# Altium PCB Core CNC Shield.PcbDoc (part 1 of 2)
Units mm, origin at the board's own origin, x right, y up, seen from the top; angles counter-clockwise.
Board outline 51.13 x 88 mm, 4 copper layers (Top signal, Ground, Power, Bottom signal); 105 components, 109 nets, 541 pads, 191 vias.
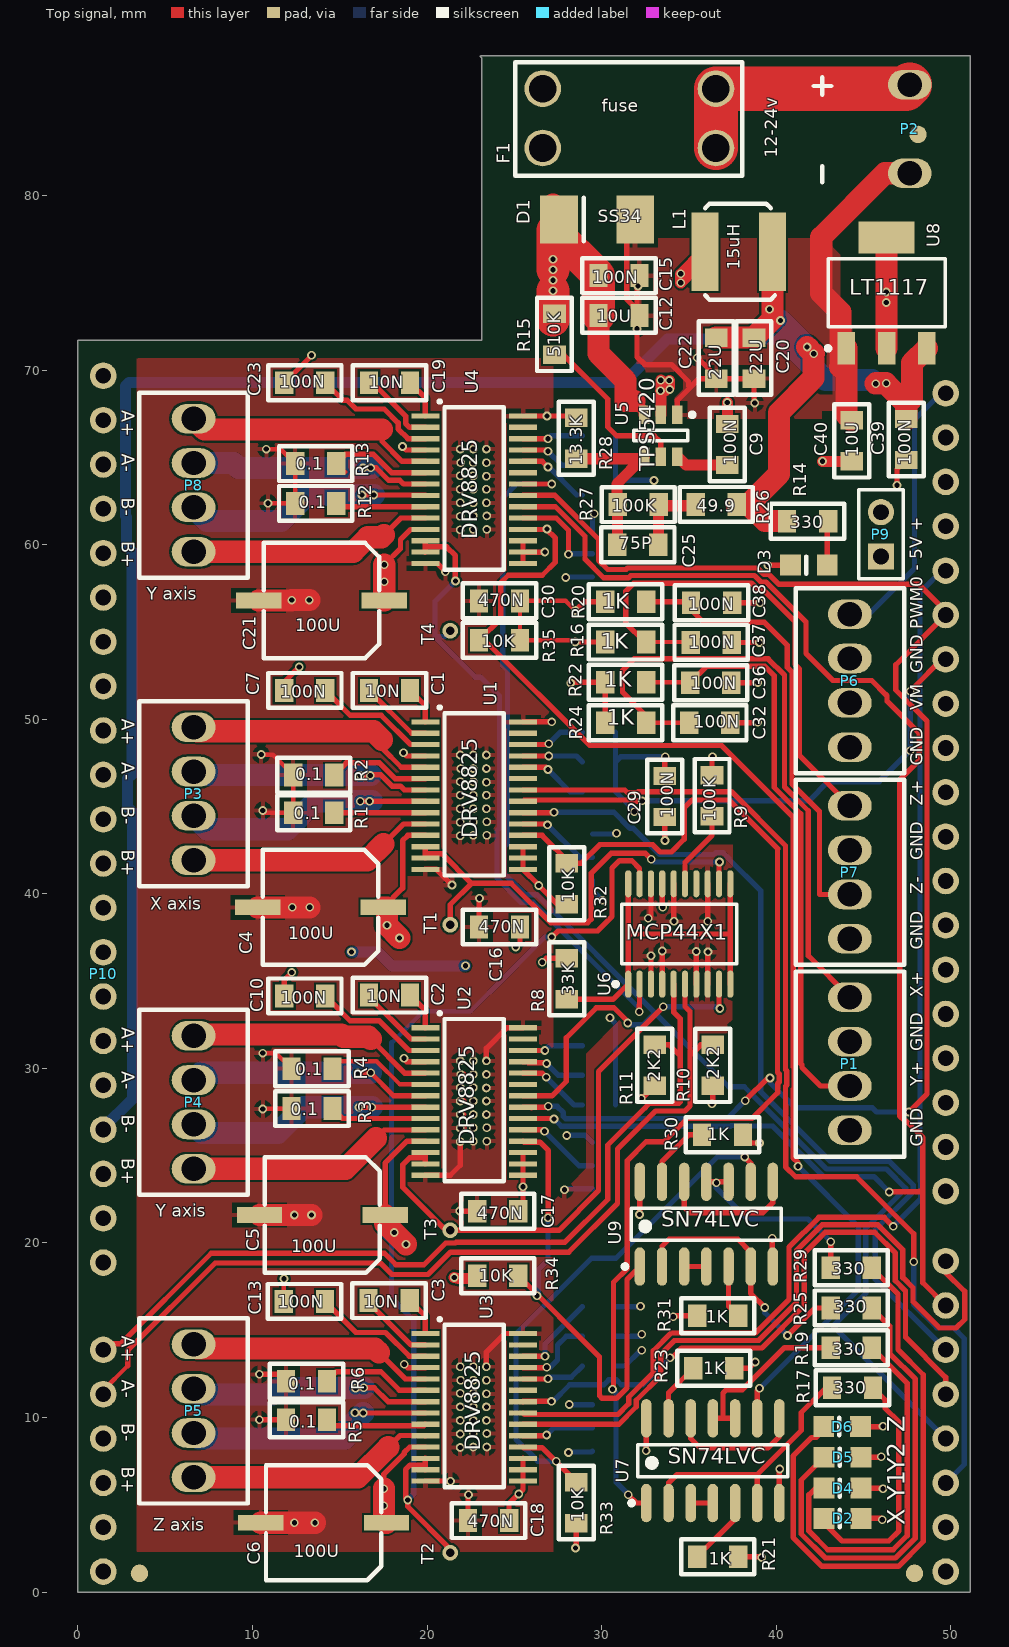
[diagram p0: Top signal view]
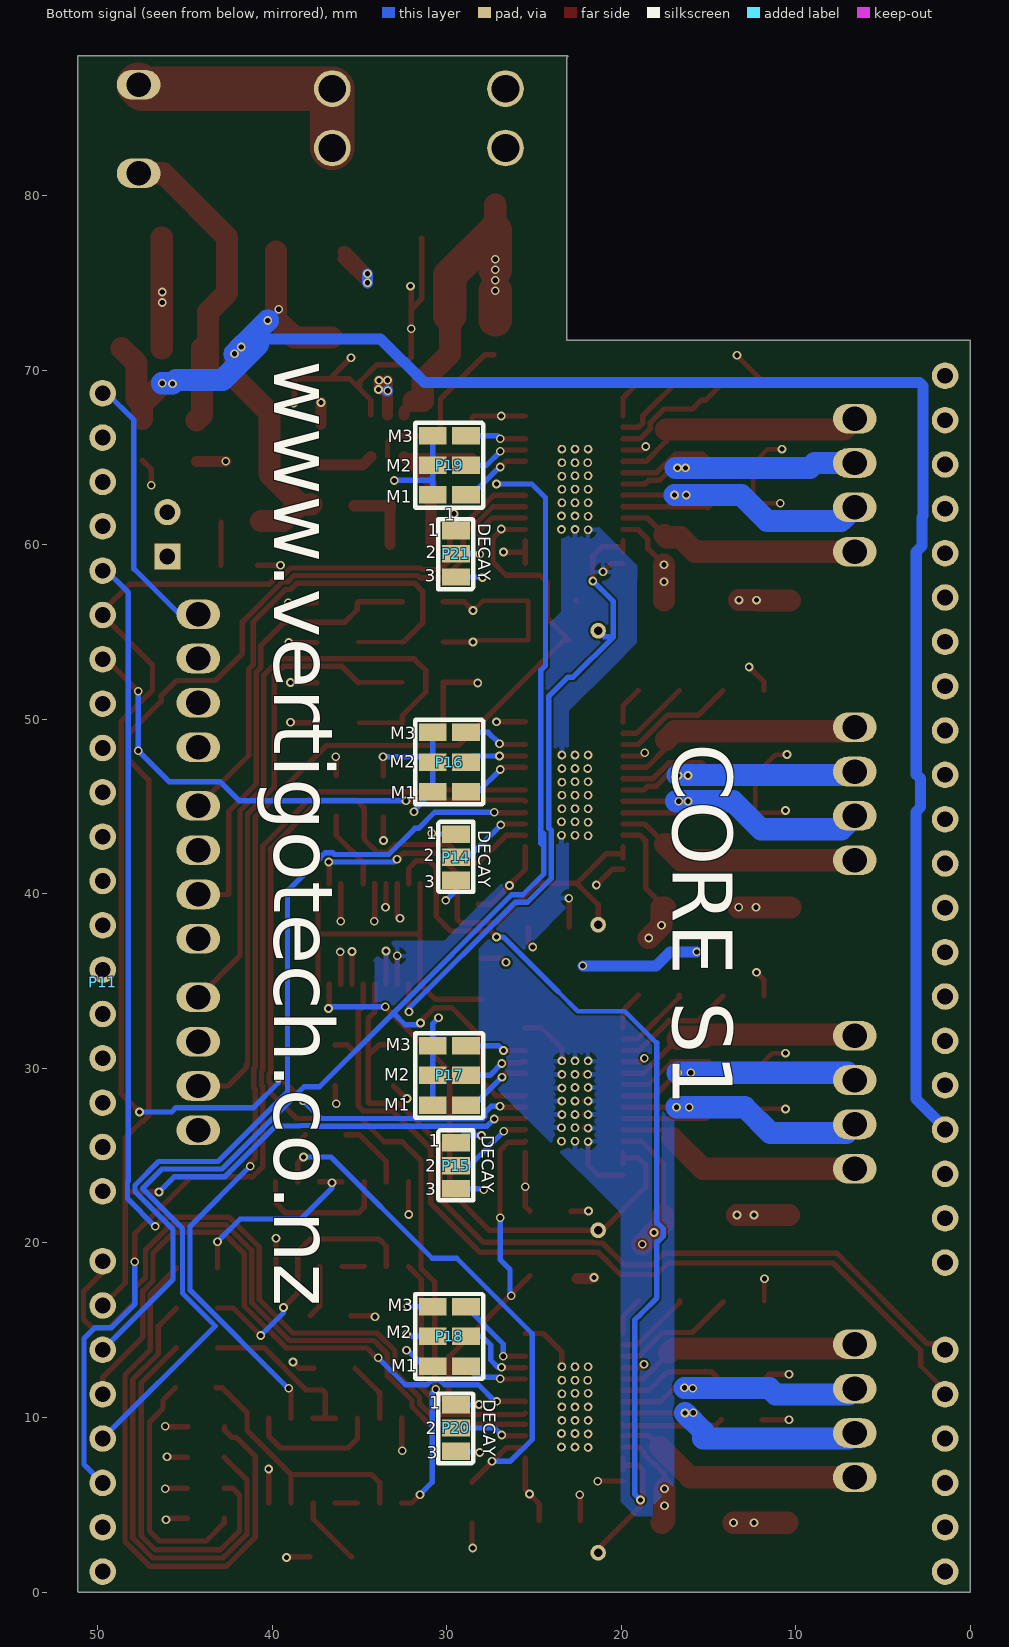
[diagram p1: Bottom signal view, seen from below]
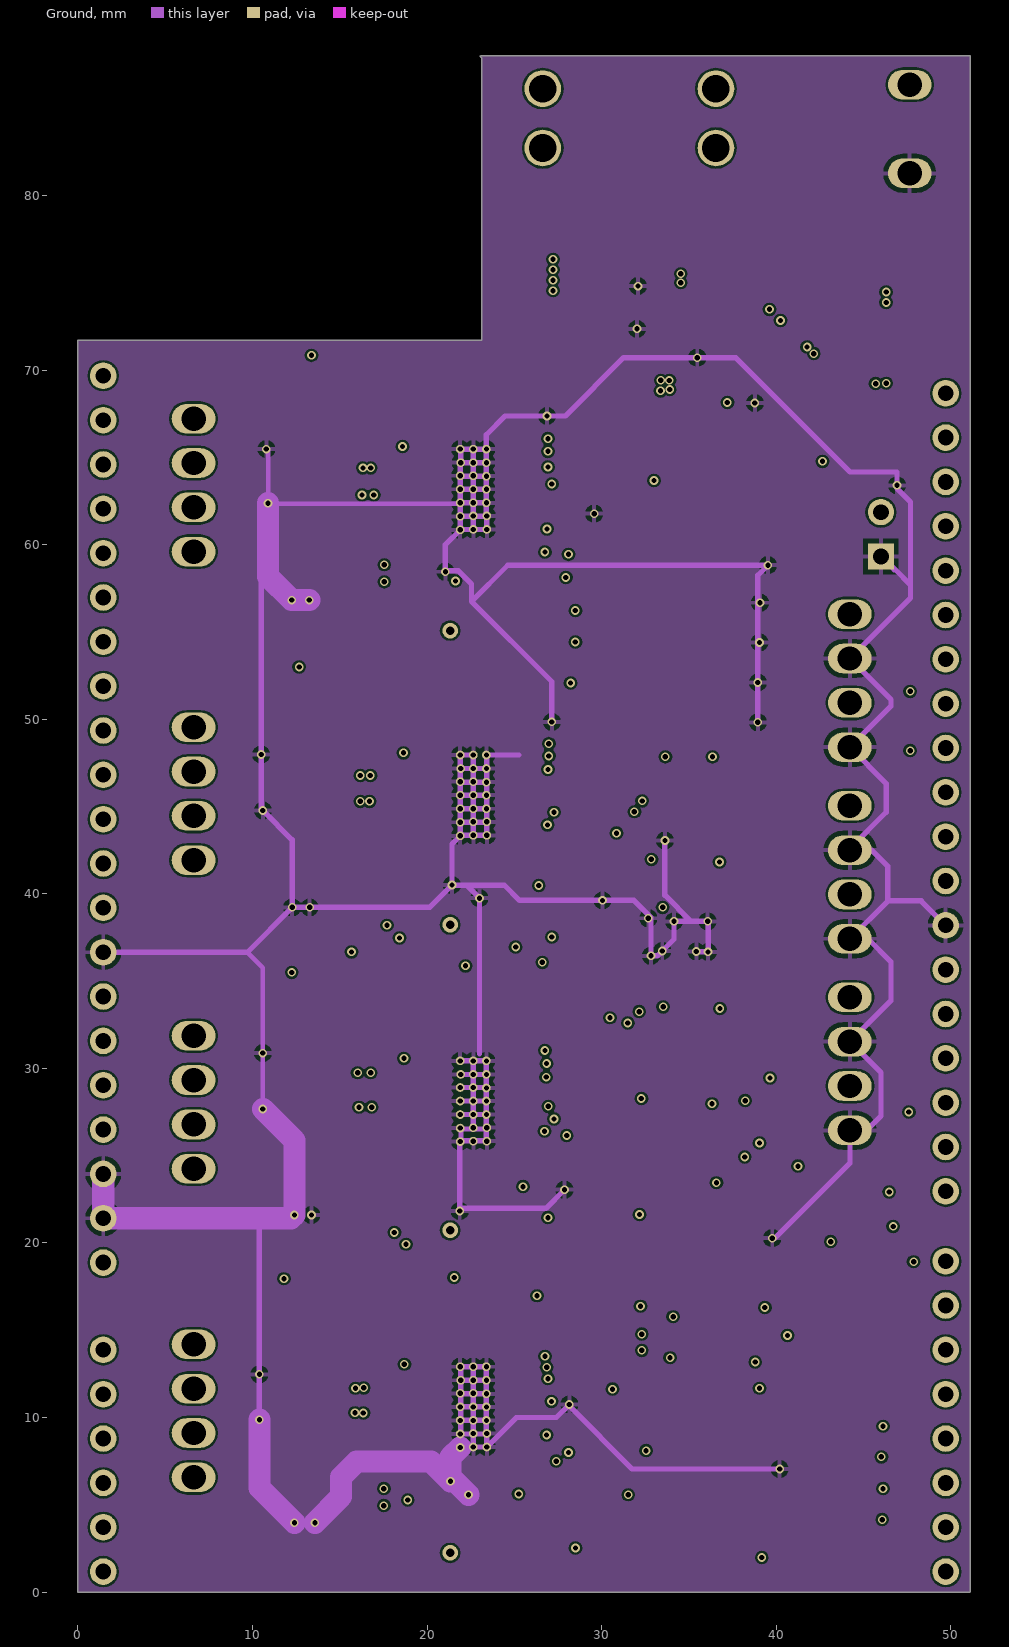
[diagram p2: Ground]
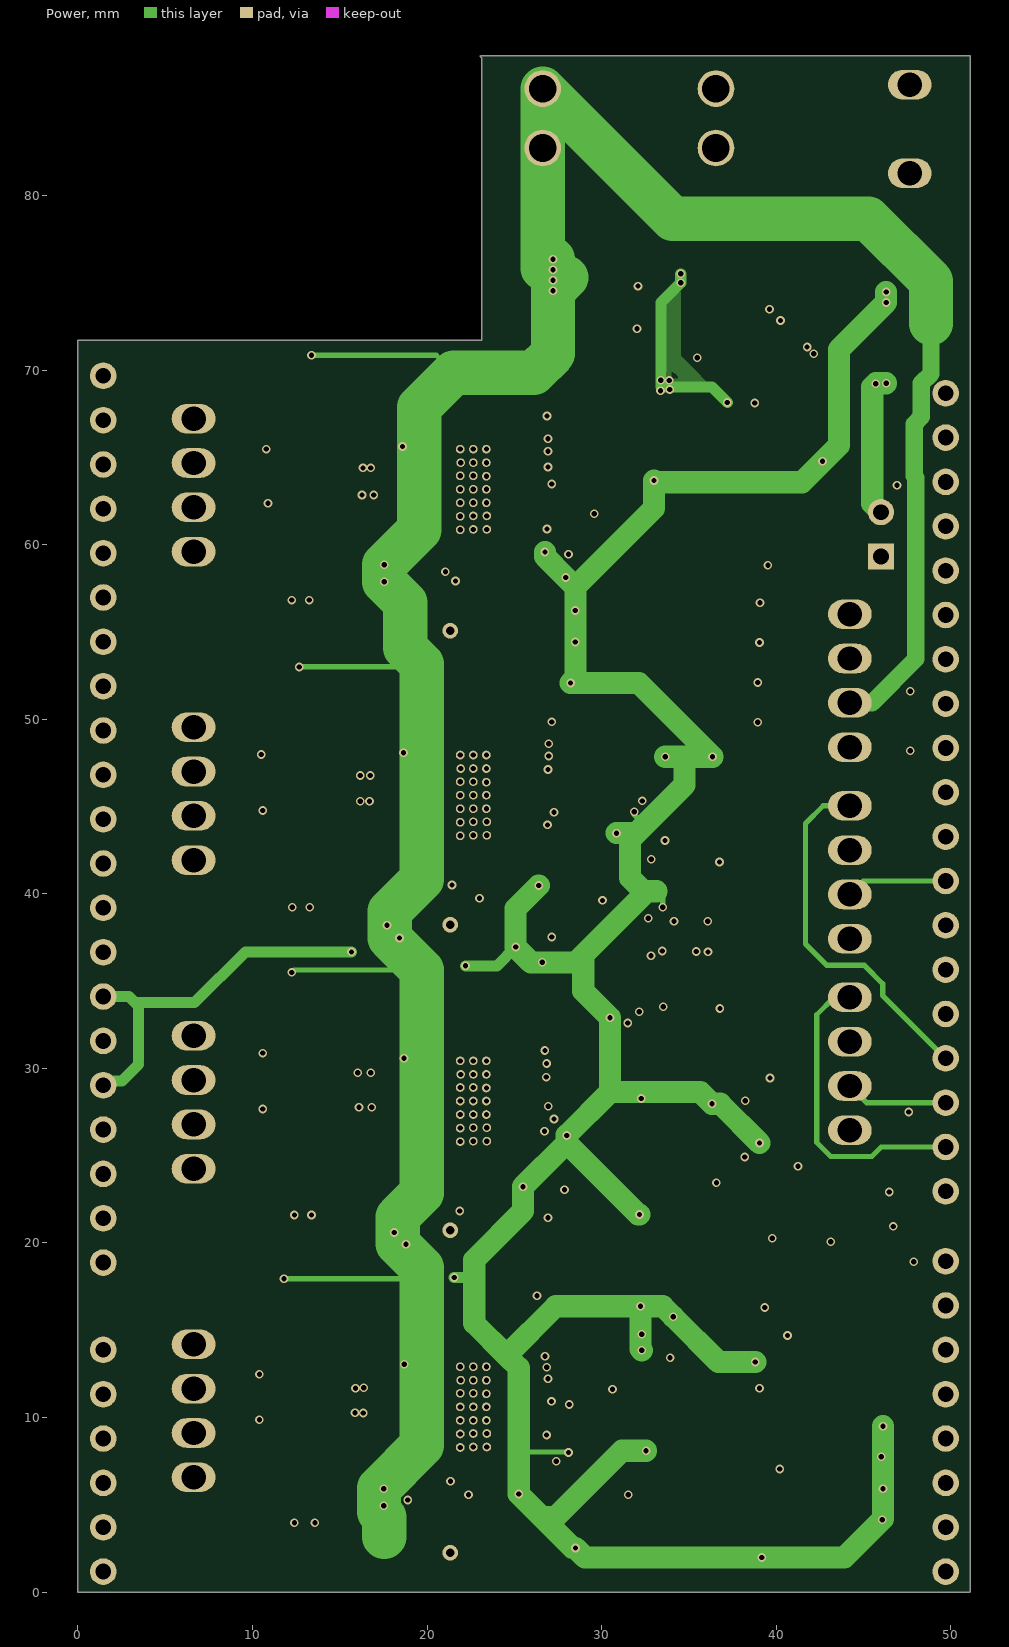
[diagram p3: Power]

## Layer stack, top to bottom
Top signal: signal copper 0.0356
Dielectric: core 0.32, FR-4, Dk 4.8
Ground: signal copper 0.0356
Dielectric: prepreg 0.32, FR-4, Dk 4.8
Power: signal copper 0.0356
Dielectric: core 0.32, FR-4, Dk 4.8
Bottom signal: signal copper 0.0356

## Board outline
23.05,87.975 23.075,88 51.125,88 51.125,0.025 51.1,0 0,0 0,71.7 23.125,71.7 23.125,87.9 23.075,87.95

## Design rules (kind name [scope] priority, off if disabled: settings)
Clearance [All] p1: gap=0.127
HoleToHoleClearance [All] p1: gap=0.127 allowstackedmicrovias=TRUE
PolygonConnect [All] p1: connectstyle=Relief reliefconductorwidth=0.254 reliefentries=4 polygonreliefangle="90 Angle" airgapwidth=0.254
RoutingVias [All] p1: holewidth=0.3 width=0.5 viastyle="Through Hole" minholewidth=0.2 minwidth=0.4 maxholewidth=0.3 maxwidth=0.5
SilkToSilkClearance [All] p1 off: silktosilkclearance=0.254
SilkToSolderMaskClearance [IsPad] p1 off: minsilkscreentomaskgap=0.254 clearancetoexposedcopper=TRUE
SolderMaskExpansion [All] p1: expansion=0.102
Width [All] p1: maxlimit=2.54 minlimit=0.254 preferedwidth=0.305
25 further rules are at their usual default settings.

## Components (designator, comment, footprint, x,y, rotation, side; value= is the part's Value field where it differs from the comment)
C1 "10nF" 0805 17.85,51.65 r0 top
C2 "10nF" 0805 17.85,34.2 r0 top
C3 "10nF" 0805 17.825,16.7 r0 top
C4 "100uF" "470uf/ 100uf 50v smd" 13.9,39.225 r90 top
C5 "100uF" "470uf/ 100uf 50v smd" 14,21.6 r90 top
C6 "100uF" "470uf/ 100uf 50v smd" 14.075,3.975 r90 top
C7 "100nF" 0805 13,51.65 r180 top
C9 "100nF" 0805 37.201,65.735 r270 top
C10 "100nF" 0805 13,34.15 r180 top
C12 "10uF" 0805 30.993,73.134 r180 top
C13 "100nF" 0805 12.975,16.65 r180 top
C15 "100nF" 0805 30.993,75.42 r0 top
C16 "470nF" 0805 24.15,38.1 r0 top
C17 "470nF" 0805 24.05,21.825 r0 top
C18 "470nF" 0805 23.525,4.1 r0 top
C19 "10nF" 0805 17.85,69.275 r0 top
C20 "22uF" 0805 38.725,70.688 r270 top
C21 "100uF" "470uf/ 100uf 50v smd" 13.95,56.8 r90 top
C22 "22uF" 0805 36.566,70.688 r270 top
C23 "100nF" 0805 13,69.275 r180 top
C25 "75pF" 0805 32.075,60 r180 top
C29 "100nF" 0805 33.625,45.575 r90 top
C30 "470nF" 0805 24.15,56.78 r0 top
C32 "100nF" 0805 36.2,49.8 r180 top
C36 "100nF" 0805 36.25,52.1 r180 top
C37 "100nF" 0805 36.275,54.4 r180 top
C38 "100nF" 0805 36.3,56.675 r180 top
C39 "100nF" 0805 47.45,66.025 r90 top
C40 "10uF" 0805 44.325,65.95 r270 top
D1 "SS34" Diode 31.975,78.625 r180 top
D2 "X fault" "0805 LED" 44.85,4.225 r180 top
D3 "Power LED" "0805 LED" 42.925,58.825 r180 top
D4 "Y1 fault" "0805 LED" 44.85,5.95 r180 top
D5 "Y2 fault" "0805 LED" 44.85,7.725 r180 top
D6 "Z fault" "0805 LED" 44.825,9.475 r180 top
F1 "Fuse 1" "mini auto fuse" 36.55,86.125 r180 top
L1 "15uh" "SRN4018 inductor" 35.931,76.784 r0 top
P1 "Header 4" "4 way screw" 44.425,26.55 r90 top
P2 "Header 2" "2 pin screw con" 47.65,81.275 r90 top
P3 "Header 4" "4 pin screw" 6.625,41.925 r90 top
P4 "Header 4" "4 pin screw" 6.625,24.25 r90 top
P5 "Header 4" "4 pin screw" 6.625,6.575 r90 top
P6 "Header 4" "4 way screw" 44.425,48.5 r90 top
P7 "Header 4" "4 way screw" 44.425,37.525 r90 top
P8 "Header 4" "4 pin screw" 6.625,59.6 r90 top
P9 "Header 2" HDR1X2 46,59.325 r90 top
P10 "gem shield 1 of 2" "gem shield 1 of 2" 1.51,1.175 r0 top
P11 "gem shield 2 of 2" "gem shield 2 of 2" 49.71,1.175 r180 bottom
P14 "" "2 way jumper" 29.475,43.425 r180 bottom
P15 "" "2 way jumper" 29.475,25.75 r180 bottom
P16 "" "3 way jumper" 28.9,45.85 r90 bottom
P17 "" "3 way jumper" 28.9,27.9 r90 bottom
P18 "" "3 way jumper" 28.9,12.95 r90 bottom
P19 "" "3 way jumper" 28.9,62.85 r90 bottom
P20 "" "2 way jumper" 29.475,8.075 r0 bottom
P21 "" "2 way jumper" 29.475,58.15 r0 bottom
R1 "0.1R" 0805 13.507,44.644 r180 top
R2 "0.1R" 0805 13.507,46.803 r0 top
R3 "0.1R" 0805 13.407,27.699 r180 top
R4 "0.1R" 0805 13.407,29.985 r0 top
R5 "0.1R" 0805 13.095,9.875 r180 top
R6 "0.1R" 0805 13.095,12.075 r0 top
R8 "33k" 0805 27.996,35.132 r90 top
R9 "100k" 0805 36.325,45.625 r90 top
R10 "2.2k" 0805 36.375,30.175 r270 top
R11 "2.2k" 0805 33.05,30.175 r270 top
R12 "0.1R" 0805 13.618,62.364 r180 top
R13 "0.1R" 0805 13.618,64.65 r0 top
R14 "330R" 0805 41.8,61.35 r0 top
R15 "510k" 0805 27.3,72.05 r90 top
R16 "1k" 0805 31.375,54.425 r0 top
R17 "330R" 0805 44.375,11.7 r0 top
R19 "330R" 0805 44.3,14 r0 top
R20 "1k" 0805 31.375,56.725 r0 top
R21 "1k" 0805 36.65,2.025 r0 top
R22 "1k" 0805 31.375,52.125 r0 top
R23 "1k" 0805 36.425,12.825 r0 top
R24 "1k" 0805 31.375,49.8 r0 top
R25 "330R" 0805 44.3,16.275 r0 top
R26 "49.9R" 0805 36.566,62.306 r0 top
R27 "100k" 0805 32.1,62.3 r0 top
R28 "13.3k" 0805 28.55,66.1 r270 top
R29 "330R" 0805 44.3,18.575 r0 top
R30 "1k" 0805 36.925,26.2 r0 top
R31 "1k" 0805 36.65,15.825 r180 top
R32 "0.1R" 0805 27.996,40.575 r90 top
R33 "0.1R" 0805 28.55,5.125 r90 top
R34 "0.1R" 0805 24.05,18.125 r0 top
R35 "0.1R" 0805 24.15,54.525 r180 top
T1 "TP2" "test point"#1 19.714,38.234 r0 top (schematic designator J1)
T2 "TP4" "test point"#2 19.4,2.25 r180 top (schematic designator J2)
T3 "TP3" "test point"#3 20.175,20.725 r90 top (schematic designator J3)
T4 "TP1" "test point"#4 21.325,55.075 r0 top (schematic designator J4)
U1 "DRV8825" "DRV8825 ic" 19.9,49.85 r0 top
U2 "DRV8825" "DRV8825 ic" 19.9,32.33 r0 top
U3 "DRV8825" "DRV8825 ic" 19.9,14.81 r0 top
U4 "DRV8825" "DRV8825 ic" 19.9,67.375 r0 top
U5 "TPS54202H" TPS54202H 33.391,66.243 r270 top
U6 "MCP44X1" MCP44X1 34.45,37.7 r90 top
U7 "SN74LVC00" sn74lv00 36.375,7.525 r90 top
U8 "LT1117-3.3v" SOT223 46.325,74.425 r90 top
U9 "SN74LVC00" sn74lv00 36,21.075 r90 top
? "" fiducial#1 47.725,3.475 r270 top
? "" fiducial#2 3.325,0.5 r270 top
? "" fiducial#1 47.925,85.9 r270 top

## Footprints (in the part's own frame and the unit in brackets; to place one, negate y for a bottom-side part, rotate by r counter-clockwise, add the part's x,y. Pads: shape width x height; smd on the part's side, far side on the other; paste and mask are expansions set on the pad)
"2 pin screw con" [mm]
  oval 1.7x2.5 hole 1.4: 1(0,0) 2(5.08,0)
  silkscreen extent -0.5,4.5 5.5,5.5
"2 way jumper" [mm]
  rect 1.6x1 smd: 1(0,-1.325) 2(0,0) 3(0,-2.65)
  silkscreen extent -1,-3.3 1,0.7
"3 way jumper" [mm]
  rect 1x1.6 smd: 1(0,1.9) 2(1.7,1.9) 3(3.4,1.9) 4(3.4,0) 5(1.7,0) 6(0,0)
  silkscreen extent -0.72,-1 4.13,2.9
"4 pin screw" [mm]
  oval 1.7x2.5 hole 1.4: 1(0,0) 2(2.54,0) 3(5.08,0) 4(7.62,0)
  silkscreen extent -1.5,-3.1 9.1,3.1
"4 way screw" [mm]
  oval 1.7x2.5 hole 1.4: 1(-0.1,0.2) 2(2.44,0.2) 3(4.98,0.2) 4(7.52,0.2)
  silkscreen extent -1.6,-2.9 9,3.3
"470uf/ 100uf 50v smd" [mm]
  rect 0.9x2.6 smd: 1(0,-3.6) 2(0,3.6)
  silkscreen extent -3.3,-3.3 3.3,3.3
0805 [mm]
  rect 1.05x1.3 smd: 1(-1.175,0) 2(1.175,0)
  silkscreen extent -2.1,-1 2.1,1, body extent -1.15,-0.67 1.15,0.68, height 0.76
"0805 LED" [mm]
  rect 1.2x1.2 smd: 1(0,0) 2(2.1,0)
  silkscreen extent 1.2,-0.5 1.2,0.5, body extent 0,-0.6 2.1,0.6, height 2
Diode [mil]
  rect 85x107.99 smd: 1(1.96,0) 2(174.02,0)
  silkscreen extent 118,-49 118,49, body extent 10,-59 167,59, height 197
"DRV8825 ic" [mm]
  round 1 on Top Paste: 0(0.125,-9.75) 0(5.275,1.25)
  round 1.524 on Top Solder: 0(0.125,-9.75) 0(5.275,1.25)
  rect 1.6x0.3 smd: 1(0,0) 2(0,-0.65) 3(0,-1.3) 4(0,-1.95) 5(0,-2.6) 6(0,-3.25) 7(0,-3.9) 8(0,-4.55) 9(0,-5.2) 10(0,-5.85) 11(0,-6.5) 12(0,-7.15) 13(0,-7.8) 14(0,-8.45) 15(5.6,-8.45) 16(5.6,-7.8) 17(5.6,-7.15) 18(5.6,-6.5) 19(5.6,-5.85) 20(5.6,-5.2) 21(5.6,-4.55) 22(5.6,-3.9) 23(5.6,-3.25) 24(5.6,-2.6) 25(5.6,-1.95) 26(5.6,-1.3) 27(5.6,-0.65) 28(5.6,0)
  round 0.5 hole 0.3: 29(2,-6.525) 29(2,-5.75) 29(2,-4.975) 29(2,-4.2) 29(2,-3.425) 29(2,-1.9) 29(2.025,-2.675) 29(2.75,-6.5) 29(2.75,-5.725) 29(2.75,-4.975) 29(2.75,-4.2) 29(2.75,-3.425) 29(2.75,-2.675) 29(2.75,-1.9) 29(3.5,-4.975) 29(3.5,-4.2) 29(3.5,-3.452) 29(3.5,-2.675) 29(3.5,-1.9) 29(3.525,-6.5) 29(3.525,-5.725)
  silkscreen extent 0.77,-8.8 4.5,0.88, body extent 1,-8.75 4.5,0.5, height 3
fiducial#1 [mm]
  round 1 smd paste+0 mask+0.5: 0(2.4,0.2)
fiducial#2 [mm]
  round 1 smd paste+0 mask+0.5: 0(-0.575,0.2)
"gem shield 1 of 2" [mm]
  round 1.524 hole 0.9: 1(-0.06,68.5) 2(-0.06,65.96) 3(-0.06,63.42) 4(-0.06,60.88) 5(-0.06,58.34) 6(-0.06,55.8) 7(-0.06,53.26) 8(-0.06,50.72) 9(-0.06,48.18) 10(-0.06,45.64) 11(-0.06,43.1) 12(-0.06,40.56) 13(-0.06,38.02) 14(-0.06,35.48) 15(-0.06,32.94) 16(-0.06,30.4) 17(-0.06,27.86) 18(-0.06,25.32) 19(-0.06,22.78) 20(-0.06,20.24) 21(-0.06,17.7) 22(-0.06,12.7) 23(-0.06,10.16) 24(-0.06,7.62) 25(-0.06,5.08) 26(-0.06,2.54) 27(-0.06,0)
"gem shield 2 of 2" [mil]
  round 60 hole 35.43: 28(0,0) 29(0,100) 30(0,200) 31(0,300) 32(0,400) 33(0,500) 34(0,600) 35(0,700) 36(0,857.48) 37(0,957.48) 38(0,1057.48) 39(0,1157.48) 40(0,1257.48) 41(0,1357.48) 42(0,1457.48) 43(0,1557.48) 44(0,1657.48) 45(0,1757.48) 46(0,1857.48) 47(0,1957.48) 48(0,2057.48) 49(0,2157.48) 50(0,2257.48) 51(0,2357.48) 52(0,2457.48) 53(0,2557.48) 54(0,2657.48)
HDR1X2 [mm] "Connector; Header; 2 Position"
  rect 1.5x1.5 hole 0.9: 1(0,0)
  round 1.5 hole 0.9: 2(2.54,0)
  silkscreen extent -1.27,-1.27 3.81,1.27
MCP44X1 [mm] "TSOP, 20-Leads, Body 6.50x4.40mm, Pitch 0.65mm, Thermal Pad 3.50.2x2.50.2mm, IPC Medium Density"
  oval 1.55x0.35 smd: 1(-2.875,2.925) 2(-2.875,2.275) 3(-2.875,1.625) 4(-2.875,0.975) 5(-2.875,0.325) 6(-2.875,-0.325) 7(-2.875,-0.975) 8(-2.875,-1.625) 9(-2.875,-2.275) 10(-2.875,-2.925) 11(2.875,-2.925) 12(2.875,-2.275) 13(2.875,-1.625) 14(2.875,-0.975) 15(2.875,-0.325) 16(2.875,0.325) 17(2.875,0.975) 18(2.875,1.625) 19(2.875,2.275) 20(2.875,2.925)
  silkscreen extent -3,-3.3 1.7,3.77, body extent -2.25,-3.3 2.25,3.3, height 3
"mini auto fuse" [mm]
  round 2.1 hole 1.58: 1(0,3.4) 1(0,0) 2(9.92,0) 2(9.92,3.4)
  silkscreen extent -1.5,-1.5 11.5,5
sn74lv00 [mm] "SOP, 14-Leads, Body 8.65x3.90mm, Pitch 1.27mm, IPC Medium Density"
  oval 2.2x0.6 smd: 1(-2.425,3.81) 2(-2.425,2.54) 3(-2.425,1.27) 4(-2.425,0) 5(-2.425,-1.27) 6(-2.425,-2.54) 7(-2.425,-3.81) 8(2.425,-3.81) 9(2.425,-2.54) 10(2.425,-1.27) 11(2.425,0) 12(2.425,1.27) 13(2.425,2.54) 14(2.425,3.81)
  silkscreen extent -2.55,-4.3 0.93,4.78, body extent -2,-4.3 2,4.3, height 1.75
SOT223 [mm] "SOT223, 4-Leads, Body 6.50x7.00mm (avg), Pitch 2.30mm, IPC Medium Density"
  rect 1.85x1 smd: 1(-3.175,-2.3) 2(-3.175,2.3) 3(-3.175,0)
  rect 1.85x3.2 smd: 3(3.175,0)
  silkscreen extent -3.3,-3.35 1.95,3.47, body extent -1.85,-3.35 1.85,3.35, height 1.6
"SRN4018 inductor" [mm]
  rect 1.55x4.5 smd: 1(0,0) 2(3.85,0)
  silkscreen extent 0,-2.75 4,2.75
"test point"#1 [mm]
  round 0.9 hole 0.5: 1(1.611,0)
"test point"#2 [mm]
  round 0.9 hole 0.5: 1(-1.925,0)
"test point"#3 [mm]
  round 0.9 hole 0.5: 1(0,-1.15)
"test point"#4 [mm]
  round 0.9 hole 0.5: 1(0,0)
TPS54202H [mm] "SOT23, 6-Leads, Body 2.90x2.80mm, Pitch 0.95mm, IPC Medium Density"
  rect 1.05x0.6 smd: 1(-1.2,0.95) 2(-1.2,0) 3(-1.2,-0.95) 4(1.2,-0.95) 5(1.2,0) 6(1.2,0.95)
  silkscreen extent -1.32,-1.55 0.3,1.93, body extent -0.87,-1.52 0.87,1.53, height 1.1

## Part data
C1 C2 C3 C7 C9 C10 C12 C13 C15 C16 C17 C18 C19 C20 C22 C23 C25 C29 C30 C32 C36 C37 C38 C39 C40: library part Cap, "Capacitor"
C4 C5 C6 C21: library part "Cap Pol1", "Polarized Capacitor (Radial)"
D1: library part Diode, "Default Diode"
D2 D3 D4 D5 D6: library part LED2, "Typical RED, GREEN, YELLOW, AMBER GaAs LED"
F1: "Fuse"
L1: library part Inductor, "Inductor"
P1 P3 P4 P5 P6 P7 P8: "Header, 4-Pin"
P2 P9: "Header, 2-Pin"
P14 P15 P20 P21: library part "voltage selector"
P16 P17 P18 P19: library part "3 way jumper"
R1 R2 R3 R4 R5 R6 R8 R9 R10 R11 R12 R13 R14 R15 R16 R17 R19 R20 R21 R22 R23 R24 R25 R26 R27 R28 R29 R30 R31 R32 R33 R34 R35: library part Res1, "Resistor"
T1 T2 T3 T4: library part Socket, "Socket"
U1 U2 U3 U4: library part "DRV8825 ic"
U5: library part TPS5420H

## Via types
v1: diameter 0.5, hole 0.3, Top signal to Bottom signal, tented both sides, 191 vias

## Nets (pads, with @x,y where several pads share a name; then routed paths per layer and width w, separated by ;. In a path a pad name is that pad's centre, name@x,y a point inside that pad or via, vN(x,y) a via of type N, cw(c..) or ccw(c..) an arc to the next point about the centre after c; other vN are vias at no path point)
3.3V: C16.2 C17.2 C18.2 C29.2 C30.2 C40.2 D2.1 D4.1 D5.1 D6.1 P10.15 P10.17 P14.2 P15.2 P16.1 P16.2 P16.3 P17.1 P17.2 P17.3 P18.1 P18.2 P18.3 P19.1 P19.2 P19.3 P20.2 P21.2 R8.2 R9.2 R10.2 R11.2 R16.1 R20.1 R21.2 R22.1 R23.2 R24.1 R30.2 R31.2 R32.1 R33.1 R34.1 R35.1 U1.15 U1.16 U1.17 U2.15 U2.16 U2.17 U3.15 U3.16 U3.17 U4.15 U4.16 U4.17 U6.17 U7.14 U8.3 U9.14 | length 314.6
  Top signal w0.254: v1(28.495,54.425) 28.395,54.525 R35.1@25.325,54.525 C30.2@25.325,56.78 27.94,56.78 v1(28.495,56.225)
  Top signal w0.305: C18.2@24.7,4.1 24.7,5.075 v1(25.25,5.625) 25.5,5.875 U3.15@25.5,6.36 U3.16@25.5,7.01 U3.17@25.5,7.66 ; v1(25.075,36.95) 25.325,37.2 C16.2@25.325,38.1 ; C17.2@25.225,21.825 25.5,22.1 v1(25.5,23.225) U2.15@25.5,23.88 U2.16@25.5,24.53 U2.17@25.5,25.18 ; U1.17@25.5,42.7 U1.16@25.5,42.05 U1.15@25.5,41.4 26.4,40.5 v1(26.4,40.475) 27.475,39.4 R32.1@28.195,39.4 ; U4.15@25.5,58.925 U4.16@25.5,59.575 ; U4.17@25.5,60.225 U4.16@25.5,59.575 ; v1(26.6,36.075) 26.832,36.307 R8.2@27.996,36.307 ; v1(26.75,59.575) U4.16@25.5,59.575 ; v1(28.225,52.075) 28.175,52.125 R22.1@30.2,52.125 R24.1@30.2,49.8 ; v1(28.495,54.425) R16.1@30.2,54.425 ; v1(28.495,56.225) 28.995,56.725 R20.1@30.2,56.725 ; v1(28.5,2.525) 28.55,2.575 R33.1@28.55,3.95 ; v1(32.175,21.625) 32.175,21.6 32.19,21.615 U9.14@32.19,23.5 ; v1(32.275,28.275) 32.325,28.275 R11.2@33.05,29 ; v1(32.55,8.1) 32.565,8.115 U7.14@32.565,9.95 ; U6.17@33.475,40.575 33.475,39.225 v1(33.5,39.225) ; C29.2@33.625,46.75 33.625,47.825 v1(33.65,47.85) ; v1(34.1,15.775) 34.15,15.825 R31.2@35.475,15.825 ; v1(36.325,27.975) 36.375,28.025 R10.2@36.375,29 ; R9.2@36.325,46.8 36.325,47.825 v1(36.35,47.85) ; R23.2@37.6,12.825 38.45,12.825 v1(38.8,13.175) ; R21.2@37.825,2.025 39.125,2.025 v1(39.175,1.975) ; R30.2@38.1,26.2 38.575,25.725 v1(39.05,25.725) v1@39.1,25.675 ; D6.1@44.825,9.475 46.1,9.475 v1(46.125,9.5) ; D2.1@44.85,4.225 46,4.225 v1(46.075,4.15) ; D4.1@44.85,5.95 46.1,5.95 v1(46.125,5.925) ; D5.1@44.85,7.725 46,7.725 v1(46.025,7.75)
  Top signal w0.635: P10.17@1.449,28.796 P10.17@1.449,29.256 ; v1(21.556,18.017) 21.795,17.975 R34.1@22.525,17.975 ; v1(42.65,64.775) C40.2@44.325,64.775
  Top signal w1.27: U8.3@46.325,71.25 U8.3@46.325,77.6
  Power w0.305: 25.25,7.625 25.654,8.029 28.071,8.029 v1(28.1,8) ; v1(31.875,44.7) 31.875,44.525 32.463,43.937 ; 33.15,40.15 33.5,39.8 v1(33.5,39.225)
  Power w0.635: P10.17@1.449,29.275 2.52,29.275 3.47,30.225 ; P10.15@1.449,34.225 P10.15@1.52,34.225 ; P10.15@1.45,34.115 2.92,34.115 3.47,33.565 ; 3.475,30.425 3.475,33.765 6.69,33.765 9.6,36.675 v1(15.675,36.675) ; v1(21.556,18.017) 22.558,18.017 22.7,17.875 ; v1(22.2,35.875) 24,35.875 v1(25.075,36.95)
  Power w1.27: v1(26.4,40.475) 25.075,39.15 v1(25.075,36.95) 25.95,36.075 v1(26.6,36.075) 28.525,36.075 28.95,36.5 ; v1(26.75,59.575) 26.75,59.325 v1(27.95,58.125) 28.495,57.58 ; v1(28.001,26.151) 28.001,26.174 v1@28,26.175 ; v1(30.85,43.475) 32,43.475 ; v1(32.175,21.625) 32.1,21.625 28,25.725 ; v1(32.3,13.85) 32.225,13.925 v1(32.225,16.375) ; v1(32.55,8.1) 31.175,8.1 27.362,4.287 26.588,4.287 ; v1(33,63.675) 33,62.085 28.495,57.58 ; v1@33.05,63.575 41.475,63.575 43.6,65.7 43.6,71.175 v1(46.3,73.875) v1(46.3,74.475) ; 33.15,40.15 32.4,40.15 ; v1(33.65,47.85) 34.75,47.85 ; v1(38.8,13.175) 36.7,13.175 v1(34.1,15.775) 33.5,16.375 v1(32.225,16.375) ; v1(39.05,25.725) 36.8,27.975 v1(36.325,27.975) 35.65,28.65 30.475,28.65 ; v1(46.125,9.5) v1(46.125,5.925) 46.125,4.2 v1(46.075,4.15) 43.9,1.975 v1(39.175,1.975) 29.05,1.975 v1(28.5,2.525) 28.35,2.525 26.588,4.287 ; 24.55,13.55 27.375,16.375 v1(32.225,16.375) ; 24.55,13.55 22.7,15.4 22.7,17.875 22.7,19.025 25.5,21.825 v1(25.5,23.225) 28,25.725 ; 24.55,13.55 25.25,12.85 25.25,7.625 v1(25.25,5.625) 26.588,4.287 ; 28,25.725 v1@28,26.175 ; v1@28,26.175 30.475,28.65 ; 28.495,57.58 v1(28.495,56.225) v1(28.495,54.425) 28.495,52.345 v1(28.225,52.075) 32.125,52.075 v1(36.35,47.85) 34.75,47.85 ; 28.95,36.5 28.95,34.425 v1(30.475,32.9) 30.475,28.65 ; 28.95,36.5 32.4,39.95 32.4,40.15 ; 32,43.475 32.463,43.937 34.75,46.225 34.75,47.85 ; 32,43.475 31.625,43.1 31.625,40.925 32.4,40.15
  Bottom signal w0.305: v1(27.95,58.125) 27.975,58.15 P21.2@29.475,58.15 ; v1(28.001,26.151) 28.001,26.174 28,26.175 29.05,26.175 P15.2@29.475,25.75 ; v1(28.1,8) 28.125,8.025 29.425,8.025 P20.2@29.475,8.075 ; P14.2@29.475,43.425 30.8,43.425 v1(30.85,43.475) ; v1(30.475,32.9) 30.8,32.575 P17.3@30.8,31.3 P17.2@30.8,29.6 P17.1@30.8,27.9 ; P18.1@30.8,12.95 31.325,12.95 32.225,13.85 v1(32.3,13.85) ; P18.2@30.8,14.65 32.175,14.65 v1(32.3,14.775) ; P18.3@30.8,16.35 32.2,16.35 v1(32.225,16.375) ; P16.3@30.8,49.25 P16.2@30.8,47.55 ; P19.1@30.8,62.85 30.8,63.7 ; P19.3@30.8,66.25 P19.2@30.8,64.55 30.8,63.7 ; v1(31.875,44.7) 31.875,44.775 P16.1@30.8,45.85 P16.2@30.8,47.55 ; v1(33,63.675) 32.975,63.7 30.8,63.7 ; v1(33.65,47.85) 31.1,47.85 P16.2@30.8,47.55
  Bottom signal w0.635: v1(15.675,36.675) 17.2,36.675 18,35.875 v1(22.2,35.875)
5V: C20.1 C22.1 C39.2 L1.2 P9.2 P10.18 R14.1 R26.2 U8.1 | length 131
  Top signal w1.27: C22.1@36.566,71.863 C20.1@38.725,71.863 39.781,72.919 L1.2@39.781,76.784 ; R26.2@37.741,62.306 38.42,62.306 ; R14.1@40.625,61.35 39.377,61.35 38.42,62.306 ; v1(41.773,71.323) v1(42.154,70.942) 42.14,70.928 42.14,69.549 40.154,67.563 40.154,64.041 38.42,62.306 ; v1(46.3,69.25) 45.725,69.25 v1(45.7,69.225) ; C39.2@47.45,67.2 47.45,68.05 ; U8.1@48.625,71.25 47.775,70.4 47.775,68.375 47.45,68.05 ; v1(45.7,69.225) v1@46.225,69.225 ; v1(45.7,69.225) v1@46.225,69.225 ; v1@46.225,69.225 46.275,69.225 47.45,68.05
  Power w1.27: P9.2@46,61.865 45.5,62.365 45.5,69.025 v1(45.7,69.225) 45.725,69.25 v1(46.3,69.25)
  Bottom signal w0.305: 2.719,61.658 2.782,61.596 ; v1(39.614,73.482) v1(40.249,72.847)
  Bottom signal w0.635: P10.18@1.449,26.581 3.125,28.258 3.125,44.685 2.849,44.962 2.849,46.595 3.125,46.872 ; 2.719,61.658 2.719,69.087 2.925,69.293 31.282,69.293 33.779,71.79 41.306,71.79 ; 2.782,61.596 2.782,59.936 3.125,59.593 ; 3.1,46.83 3.1,59.55
  Bottom signal w1.27: v1(40.249,72.847) 41.306,71.79 v1(41.773,71.323) v1(42.154,70.942) ; 40.804,71.467 42.836,69.435 45.49,69.435 v1(45.7,69.225) 45.725,69.25 v1(46.3,69.25)
BOOT: C9.2 U5.6 | length 3.1
  Top signal w0.635: U5.6@34.341,65.043 34.824,64.56 C9.2@37.201,64.56
DIR1: P11.33 U1.20 | length 50.3
  Top signal w0.305: U1.20@25.5,44.65 27.25,44.65 v1(27.275,44.675)
  Bottom signal w0.305: v1(27.275,44.675) 30.7,44.675 31.625,43.75 31.824,43.75 33.317,42.257 36.433,42.257 36.531,42.354 36.969,42.354 37.279,42.044 37.279,42.012 39.121,40.171 39.121,28.654 43.111,24.664 46.497,24.664 47.856,23.305 47.856,22.947 45.675,20.766 45.675,17.91 P11.33@49.489,14.096 ; P11.33@49.455,14.096 P11.33@49.489,14.096 ; P11.33@49.709,14.096 P11.33@49.489,14.096 ; P11.33@49.71,13.875 P11.33@49.489,14.096
DIR2: P11.34 U2.20 U4.20 | length 89.4
  Top signal w0.305: U2.20@25.5,27.13 27.37,27.13 27.366,27.126 27.351,27.126 27.326,27.101 v1(27.276,27.101) ; U4.20@25.5,62.175 27.361,62.175 29.05,60.486 29.05,59.175 30.125,58.1 31.539,58.1 31.671,58.232 38.759,58.232 39.127,57.864 39.422,57.864 41.707,55.579 41.707,53.768 43.25,52.225 45.475,52.225 46.3,51.4 46.325,51.4 ; 46.35,51.35 46.35,51.039 48.204,49.185 48.204,47.66 47.071,46.526 47.071,27.281 47.381,26.971 47.469,26.971 48.404,26.035 48.404,17.721 P11.34@49.71,16.415 ; v1(46.475,22.925) 48.175,22.925 48.225,22.975 48.379,22.975
  Bottom signal w0.305: v1(27.276,27.101) 27.689,26.689 37.374,26.689 37.411,26.725 38.375,26.725 38.4,26.7 39.8,26.7 42.7,23.8 45.6,23.8 v1(46.475,22.925)
DIR3: P11.35 U3.20 | length 41.5
  Top signal w0.254: P11.35@49.709,18.252 P11.35@49.709,19.176
  Top signal w0.305: U3.20@25.5,9.61 30.98,9.61 31.986,10.616 31.986,10.99 33.396,12.4 33.396,13.644 34.165,14.414 38.998,14.414 41.168,16.584 41.168,19.579 42.626,21.036 45.824,21.036 47.257,19.604 47.257,18.015 47.839,17.433 47.839,16.636 49.35,15.125 50.3,15.125 50.8,15.625 50.8,17.225 49.71,18.315 P11.35@49.71,18.955
EN: R15.1 U5.5 | length 9.9
  Top signal w0.305: R15.1@27.3,70.875 27.825,70.875 30.35,68.35 30.35,66.745 30.851,66.243 33.01,66.243 33.391,65.862 U5.5@33.391,65.043
EN1: P11.48 U1.21 | length 29.7
  Top signal w0.305: U1.21@25.5,45.3 25.575,45.375 31.949,45.375 32.024,45.3 32.049,45.325 v1(32.325,45.325) ; v1@47.678,51.625 P11.48@49.709,53.656
  Bottom signal w0.305: v1(32.325,45.325) 41.875,45.325 42.975,46.425 45.9,46.425 v1(47.675,48.2) v1(47.675,51.6)
EN2: P11.49 U2.21 U4.21 | length 82.9
  Top signal w0.305: U2.21@25.5,27.78 U2.21@26.017,27.78 ; U4.21@25.5,62.825 27.321,62.825 29.832,60.315 29.832,59.093 30.35,58.575 31.404,58.575 31.492,58.664 38.938,58.664 39.306,58.296 39.601,58.296 40.171,57.725 48.18,57.725 P11.49@49.709,56.196 ; U2.21@25.982,27.745 U2.21@26.017,27.78 ; U2.21@26.025,27.788 U2.21@26.017,27.78 ; v1(26.95,27.825) 26.905,27.78 U2.21@26.017,27.78 ; v1(38.225,28.15) 39.525,29.45 v1(39.65,29.45) ; v1(47.6,27.5) 48.636,28.536 48.636,49.89 46.85,51.676 46.85,53.115 P11.49@49.71,55.975
  Bottom signal w0.305: v1(26.95,27.825) 27.45,27.825 27.806,27.469 27.806,27.255 27.941,27.121 31.716,27.121 31.72,27.125 37.2,27.125 v1(38.225,28.15) ; 39.65,29.175 41.075,27.75 45.5,27.75 45.75,27.5 v1(47.6,27.5) ; v1@39.65,29.425 v1(39.65,29.45)
EN3: P11.50 U3.21 | length 67.9
  Top signal w0.305: U3.21@25.5,10.26 25.585,10.175 30.934,10.175 31.554,10.794 31.554,11.169 32.964,12.579 32.964,13.823 33.986,14.846 38.819,14.846 40.736,16.763 40.736,19.758 42.447,21.468 46.182,21.468 v1(46.7,20.95)
  Bottom signal w0.305: v1(46.7,20.95) 48.288,22.538 48.288,23.483 48.236,23.536 48.236,57.263 P11.50@49.709,58.736
FB: C25.2 R27.1 R28.2 U5.4 | length 9.4
  Top signal w0.635: R28.2@28.55,64.925 U5.4@32.323,64.925 ; R27.1@30.871,62.231 30.871,63.473 ; C25.2@30.9,60 30.9,62.275 R27.1@30.925,62.3 ; 30.946,63.548 U5.4@32.323,64.925 ; U5.4@32.441,65.043 U5.4@32.323,64.925
GND: C4.2 C5.2 C6.2 C12.1 C15.2 C16.1 C17.1 C18.1 C20.2 C21.2 C22.2 C29.1 C30.1 C32.1 C36.1 C37.1 C38.1 C39.1 C40.1 D1.1 D3.2 P1.1 P1.3 P2.1 P6.1 P6.3 P7.1 P7.3 P9.1 P10.14 P10.19 P10.20 P11.42 P14.3 P15.3 P20.3 P21.3 R1.2 R2.1 R3.2 R4.1 R5.2 R6.1 R12.2 R13.1 R28.1 U1.14 U1.28 U1.29 U2.14 U2.28 U2.29 U3.14 U3.28 U3.29 U4.14 U4.28 U4.29 U5.1 U6.3 U6.4 U6.7 U6.8 U6.13 U6.16 U6.18 U7.7 U8.2 U9.7 | length 551
  Top signal w0.254: v1(10.5,47.975) 11.16,47.975 11.318,47.818 R2.1@12.332,46.803 R1.2@12.332,44.644 10.726,44.644 v1(10.595,44.775) ; v1(10.595,27.675) 10.619,27.699 R3.2@12.232,27.699 ; v1(10.595,30.875) 11.342,30.875 R4.1@12.232,29.985 ; v1(10.795,65.475) 11.618,65.475 R13.1@12.443,64.65 R12.2@12.443,62.364 10.906,62.364 v1(10.895,62.375)
  Top signal w0.305: v1(10.395,9.875) R5.2@11.92,9.875 ; v1(10.395,12.475) 11.52,12.475 R6.1@11.92,12.075 ; U3.14@19.9,6.36 21.34,6.36 v1(21.35,6.35) ; U2.14@19.9,23.88 21.33,23.88 21.9,24.45 U2.29@21.9,25.805 ; U1.14@19.9,41.4 20.525,41.4 v1(21.425,40.5) ; U4.14@19.9,58.925 20.6,58.925 21.05,58.475 v1(21.05,58.45) ; v1(21.875,21.825) C17.1@22.875,21.825 ; U2.29@22.073,26.613 U2.29@22.123,26.613 ; U2.29@22.073,27.363 U2.29@22.098,27.363 ; U2.29@22.073,28.138 U2.29@22.098,28.138 ; U2.29@22.073,29.663 U2.29@22.098,29.663 ; C18.1@22.35,4.1 22.35,5.55 v1(22.375,5.575) ; C30.1@22.55,56.75 C30.1@22.58,56.78 ; C16.1@22.975,38.1 22.975,39.725 v1(23,39.75) ; U3.29@23.4,12.91 23.4,13.75 24.46,14.81 U3.28@25.5,14.81 ; U2.29@23.4,30.43 23.4,31.15 24.58,32.33 U2.28@25.5,32.33 ; U1.28@25.5,49.85 v1(27.15,49.85) ; U4.28@25.5,67.375 v1(26.875,67.375) 28.45,67.375 R28.1@28.55,67.275 ; D1.1@31.436,77.547 31.436,74.072 32.026,73.482 32.026,74.76 v1(32.078,74.812) ; C12.1@32.03,73.478 v1(32.03,72.364) 32.026,72.364 32.026,70.76 32.474,70.312 34.002,70.312 34.978,69.336 34.978,69.112 ; v1(32.677,38.602) 32.825,38.75 U6.18@32.825,40.575 ; U6.3@32.825,34.825 v1(32.825,36.45) ; U6.4@33.475,34.825 v1(33.475,36.725) ; v1(33.625,43.05) C29.1@33.625,44.4 ; U6.16@34.125,40.575 34.125,38.45 v1(34.15,38.425) ; U5.1@34.341,67.443 34.341,68.275 35.579,69.513 C22.2@36.566,69.513 ; U6.7@35.425,34.825 v1(35.425,36.7) ; v1(35.478,70.712) 36.566,69.624 C22.2@36.566,69.513 ; U6.8@36.075,34.825 36.075,36.65 v1(36.1,36.675) ; v1(36.075,38.425) U6.13@36.075,40.575 ; C32.1@37.375,49.8 38.925,49.8 v1(38.95,49.825) ; C36.1@37.425,52.1 v1(38.95,52.1) ; C37.1@37.45,54.4 v1(39.05,54.4) ; C38.1@37.475,56.675 v1(39.075,56.675) ; v1(38.778,68.112) 38.725,68.165 C20.2@38.725,69.513 C22.2@36.566,69.513 ; v1(39.525,58.825) D3.2@40.825,58.825 ; v1(39.775,20.275) 39.775,18.685 U9.7@39.81,18.65 ; U7.7@40.185,5.1 40.185,7.035 v1(40.2,7.05) ; v1(46.925,63.4) 46.925,64.325 C39.1@47.45,64.85
  Top signal w1.27: C4.2@10.3,39.225 v1(12.275,39.225) v1(13.275,39.225) ; C21.2@10.35,56.8 12.225,56.8 v1(12.25,56.825) v1(13.25,56.825) ; C5.2@10.4,21.6 v1(12.4,21.6) v1(13.375,21.6) ; C6.2@10.475,3.975 v1(12.4,3.975) v1(13.575,3.975) ; 43.664,70.18 43.678,70.194 43.678,73.312 42.578,74.412 42.578,77.612 46.241,81.275 P2.1@47.65,81.275 ; U8.2@44.025,71.25 44.025,67.425 C40.1@44.325,67.125
  Ground w0.254: 9.705,36.655 10.595,35.765 v1(10.595,30.875) v1(10.595,27.675) ; v1@10.895,65.375 v1(10.895,62.375) 10.924,62.346 U4.29@21.846,62.346
  Ground w0.305: P10.14@1.45,36.655 9.705,36.655 v1(12.275,39.225) ; v1(10.395,9.875) v1(10.395,12.475) 10.395,21.295 ; 10.895,58.18 10.5,57.785 v1(10.5,47.975) 10.5,44.87 v1(10.595,44.775) 12.275,43.095 v1(12.275,39.225) ; U3.29@21.9,9.06 U3.29@21.925,9.06 ; U3.29@21.9,9.835 U3.29@21.925,9.835 ; U3.29@21.9,10.61 U3.29@21.925,10.61 ; U2.29@21.9,25.805 21.875,25.78 v1(21.875,21.825) 22.029,21.979 26.804,21.979 v1(27.875,23.05) ; U2.29@21.9,27.355 U2.29@22.65,27.355 ; U2.29@21.9,28.13 U2.29@22.65,28.13 ; U2.29@21.9,28.905 U2.29@22.65,28.905 ; U2.29@21.9,30.43 U2.29@22.65,30.43 ; U2.29@21.925,29.655 U2.29@22.65,29.655 ; U1.29@21.925,43.35 U1.29@22.65,43.35 ; U1.29@21.925,47.175 U1.29@22.65,47.175 ; U3.29@21.927,11.358 U3.29@22.65,11.358 ; U1.29@21.927,46.398 U1.29@22.65,46.398 ; U4.29@21.927,63.923 U4.29@22.65,63.923 ; U4.29@22.027,60.85 22.052,60.875 U4.29@22.65,60.875 ; U2.29@22.65,26.605 U2.29@22.65,27.355 ; 23,30.83 v1(23,39.75) 22.25,40.5 ; U2.29@23.35,26.53 21.95,26.53 21.95,25.855 23.4,25.855 U2.29@23.4,27.355 ; U2.29@23.373,28.905 U2.29@22.65,28.905 ; U3.29@23.4,9.06 U3.29@22.65,9.06 ; U1.29@23.4,44.1 U1.29@22.65,44.1 ; U1.29@23.4,44.875 U1.29@22.65,44.875 ; U1.29@23.4,45.65 U1.29@22.65,45.65 ; U1.29@23.4,46.398 U1.29@22.65,46.398 ; U1.29@23.4,47.175 U1.29@22.65,47.175 ; U4.29@23.4,61.625 U4.29@22.65,61.625 ; 25.25,47.95 U1.29@23.4,47.95 23.425,47.925 U1.29@23.425,44.125 U1.29@23.425,43.35 U1.29@22.65,43.35 ; v1(27.15,49.85) 27.15,52.15 22.55,56.75 ; v1(32.677,38.602) v1@32.775,38.7 ; v1(33.625,43.05) 33.625,39.925 35.125,38.425 ; v1(35.425,36.7) 35.45,36.675 v1(36.1,36.675) 36.1,38.4 v1(36.075,38.425) 35.125,38.425 ; v1(38.95,49.825) 38.95,58.25 v1(39.525,58.825) 24.625,58.825 22.55,56.75 ; v1(39.775,20.275) 39.925,20.275 44.225,24.575 P1.1@44.225,26.45 45.175,26.45 46,27.275 46,29.755 P1.3@44.225,31.53 46.575,33.88 46.575,36.1 45.25,37.425 P7.1@44.225,37.425 46.4,39.6 ; v1(40.2,7.05) 31.75,7.05 28.15,10.65 v1(28.15,10.75) 27.4,10 25.115,10 U3.29@23.425,8.31 ; P9.1@46,59.325 46.762,58.563 46.837,58.563 ; P9.1@46.475,59.35 46.475,58.925 46.837,58.563 ; P11.42@49.71,38.195 48.305,39.6 46.4,39.6 ; v1(12.275,39.225) v1(13.275,39.225) 20.15,39.225 v1(21.425,40.5) ; v1(21.425,40.5) 22.25,40.5 ; v1(21.425,40.5) 21.425,42.85 U1.29@21.9,43.325 U1.29@21.9,44.1 ; U1.29@21.9,44.1 U1.29@21.9,44.875 ; U1.29@21.9,44.1 U1.29@22.65,44.1 ; U1.29@21.9,44.875 U1.29@21.9,45.65 ; U1.29@21.9,44.875 U1.29@22.65,44.875 ; U1.29@21.9,45.65 U1.29@21.9,46.425 U1.29@21.9,47.95 U1.29@22.65,47.95 U1.29@22.65,47.175 ; U1.29@21.9,45.65 U1.29@22.65,45.65 ; U4.29@21.9,61.625 U4.29@21.9,60.85 21.05,60 v1(21.05,58.45) 21.1,58.5 21.799,58.5 22.55,57.749 22.55,56.75 ; U4.29@21.9,61.625 U4.29@21.9,62.4 ; U4.29@21.9,61.625 U4.29@22.65,61.625 ; U4.29@21.9,62.4 U4.29@21.9,63.175 ; U4.29@21.9,62.4 U4.29@22.65,62.4 ; U4.29@21.9,63.175 U4.29@21.9,63.95 21.9,64.675 U4.29@21.925,64.7 ; U4.29@21.9,63.175 U4.29@22.65,63.175 ; U3.29@21.925,9.06 21.925,8.31 U3.29@22.65,8.31 ; U3.29@21.925,9.06 U3.29@21.925,9.835 ; U3.29@21.925,9.06 U3.29@22.65,9.06 ; U3.29@21.925,9.835 U3.29@22.65,9.835 ; U3.29@21.925,9.835 U3.29@21.925,10.61 ; U3.29@21.925,10.61 U3.29@22.65,10.61 ; U3.29@21.925,10.61 U3.29@21.925,12.135 ; U3.29@21.925,12.135 U3.29@22.65,12.135 ; U3.29@21.925,12.135 21.925,12.885 U3.29@21.9,12.91 U3.29@22.65,12.91 ; U4.29@21.925,64.7 21.925,65.45 U4.29@21.9,65.475 U4.29@22.65,65.475 ; U4.29@21.925,64.7 U4.29@22.65,64.7 ; 22.25,40.5 24.425,40.5 25.3,39.625 v1(30.05,39.625) 31.85,39.625 v1@32.775,38.7 ; U3.29@22.65,8.31 U3.29@23.425,8.31 ; U3.29@22.65,8.31 U3.29@22.65,9.06 ; U3.29@22.65,9.06 U3.29@22.65,9.085 U3.29@22.65,9.835 ; U3.29@22.65,9.835 U3.29@22.65,10.61 ; U3.29@22.65,9.835 U3.29@23.4,9.835 ; U3.29@22.65,10.61 U3.29@22.65,11.358 ; U3.29@22.65,10.61 U3.29@23.4,10.61 ; U3.29@22.65,11.358 U3.29@23.4,11.358 ; U3.29@22.65,11.358 U3.29@22.65,11.385 U3.29@22.65,12.135 ; U3.29@22.65,12.135 U3.29@22.65,12.91 ; U3.29@22.65,12.135 U3.29@23.4,12.135 ; U3.29@22.65,12.91 U3.29@23.4,12.91 U3.29@23.4,12.135 ; U2.29@22.65,27.355 U2.29@22.65,28.13 ; U2.29@22.65,27.355 U2.29@23.4,27.355 ; U2.29@22.65,28.13 U2.29@22.65,28.905 ; U2.29@22.65,28.13 U2.29@23.4,28.13 ; U2.29@22.65,28.905 U2.29@22.65,29.655 ; U2.29@22.65,29.655 U2.29@22.65,30.43 ; U2.29@22.65,29.655 U2.29@23.4,29.655 ; U2.29@22.65,30.43 U2.29@23.4,30.43 U2.29@23.4,29.655 ; U1.29@22.65,43.35 U1.29@22.65,44.1 ; U1.29@22.65,44.1 U1.29@22.65,44.125 U1.29@22.65,44.875 ; U1.29@22.65,44.875 U1.29@22.65,45.65 ; U1.29@22.65,45.65 U1.29@22.65,46.398 ; U1.29@22.65,46.398 U1.29@22.65,46.425 U1.29@22.65,47.175 ; U4.29@22.65,60.875 U4.29@23.425,60.875 U4.29@23.425,61.65 23.4,61.675 U4.29@23.4,62.4 ; U4.29@22.65,60.875 U4.29@22.65,61.625 ; U4.29@22.65,61.625 U4.29@22.65,61.65 U4.29@22.65,62.4 ; U4.29@22.65,62.4 U4.29@22.65,63.175 ; U4.29@22.65,62.4 U4.29@23.4,62.4 ; U4.29@22.65,63.175 U4.29@22.65,63.923 ; U4.29@22.65,63.175 U4.29@23.4,63.175 ; U4.29@22.65,63.923 U4.29@23.4,63.923 ; U4.29@22.65,63.923 U4.29@22.65,63.95 U4.29@22.65,64.7 ; U4.29@22.65,64.7 U4.29@22.65,65.475 ; U4.29@22.65,64.7 U4.29@23.4,64.7 ; U4.29@22.65,65.475 U4.29@23.4,65.475 ; U3.29@23.4,9.835 U3.29@23.4,10.61 ; U3.29@23.4,9.835 23.4,9.11 U3.29@23.425,9.085 U3.29@23.425,8.31 ; U3.29@23.4,10.61 U3.29@23.4,11.358 ; U3.29@23.4,11.358 U3.29@23.4,12.135 ; U2.29@23.4,27.355 U2.29@23.4,28.13 ; U2.29@23.4,28.13 U2.29@23.4,28.878 U2.29@23.4,29.655 ; U4.29@23.4,62.4 U4.29@23.4,63.175 ; U4.29@23.4,63.175 U4.29@23.4,63.923 ; U4.29@23.4,63.923 U4.29@23.4,64.7 ; U4.29@23.4,64.7 U4.29@23.4,65.475 ; U4.29@23.4,65.475 23.4,66.3 24.475,67.375 v1(26.875,67.375) 27.925,67.375 31.262,70.712 v1(35.478,70.712) 37.678,70.712 44.228,64.162 46.925,64.162 46.925,63.225 47.7,62.45 47.7,57.7 ; v1@32.775,38.7 32.825,38.65 v1(32.825,36.45) 33.2,36.45 v1(33.475,36.725) 34.15,37.4 v1(34.15,38.425) 35.125,38.425 ; 46.4,39.6 46.4,41.575 45.47,42.505 P7.3@44.225,42.505 44.225,42.6 46.3,44.675 46.3,46.325 P6.1@44.225,48.4 46.575,50.75 46.575,51.13 P6.3@44.225,53.48 47.7,56.955 47.7,57.7 ; 46.837,58.563 47.7,57.7
  Ground w1.27: P10.19@1.45,23.955 P10.20@1.45,21.415 12.215,21.415 v1(12.4,21.6) 12.4,25.87 v1(10.595,27.675) ; v1(10.395,9.875) 10.395,5.98 v1(12.4,3.975) ; v1(10.895,62.375) 10.895,58.18 v1(12.25,56.825) v1(13.25,56.825) ; v1(13.575,3.975) 15.075,5.475 15.075,6.575 15.975,7.475 20.225,7.475 v1(21.35,6.35) ; U3.29@21.9,8.285 21.35,7.735 v1(21.35,6.35) ; v1(22.375,5.575) 21.6,6.35 v1(21.35,6.35)
  Bottom signal w0.305: v1(27.875,23.05) 27.925,23.1 P15.3@29.475,23.1 ; v1(28.15,10.75) 28.175,10.725 P20.3@29.475,10.725 ; P14.3@29.475,40.775 29.475,40.2 v1(30.05,39.625) ; P21.3@29.475,60.8 29.475,61.675 v1(29.575,61.775)
ISA1: R2.2 U1.6 | length 6.2
  Top signal w0.305: R2.2@14.884,46.601 R2.2@14.682,46.803 15.379,47.5 17.275,47.5 18.175,46.6 U1.6@19.9,46.6
ISA2: R4.2 U2.6 | length 6
  Top signal w0.254: R4.2@14.582,29.985 14.997,30.4 17.125,30.4 18.445,29.08 U2.6@19.9,29.08
ISA3: R6.2 U3.6 | length 6.7
  Top signal w0.305: R6.2@14.529,11.816 R6.2@14.27,12.075 14.82,12.625 17.35,12.625 18.415,11.56 U3.6@19.9,11.56
ISA4: R13.2 U4.6 | length 6.4
  Top signal w0.305: R13.2@15.28,64.163 R13.2@14.793,64.65 15.318,65.175 16.925,65.175 17.975,64.125 U4.6@19.9,64.125
ISB1: R1.1 U1.9 | length 5.2
  Top signal w0.305: R1.1@14.689,44.651 R1.1@14.682,44.644 19.894,44.644 U1.9@19.9,44.65
ISB2: R3.1 U2.9 | length 5.6
  Top signal w0.305: R3.1@14.582,27.699 15.151,27.13 U2.9@19.9,27.13
ISB3: R5.1 U3.9 | length 5.8
  Top signal w0.305: R5.1@14.27,9.875 14.614,9.531 19.821,9.531 U3.9@19.9,9.61
ISB4: R12.1 U4.9 | length 5.3
  Top signal w0.305: R12.1@14.793,62.364 R12.1@14.982,62.175 ; R12.1@15.04,62.117 R12.1@14.982,62.175 ; U4.9@19.9,62.175 R12.1@14.982,62.175